# Allegro board pc054a_fmc_08.brd
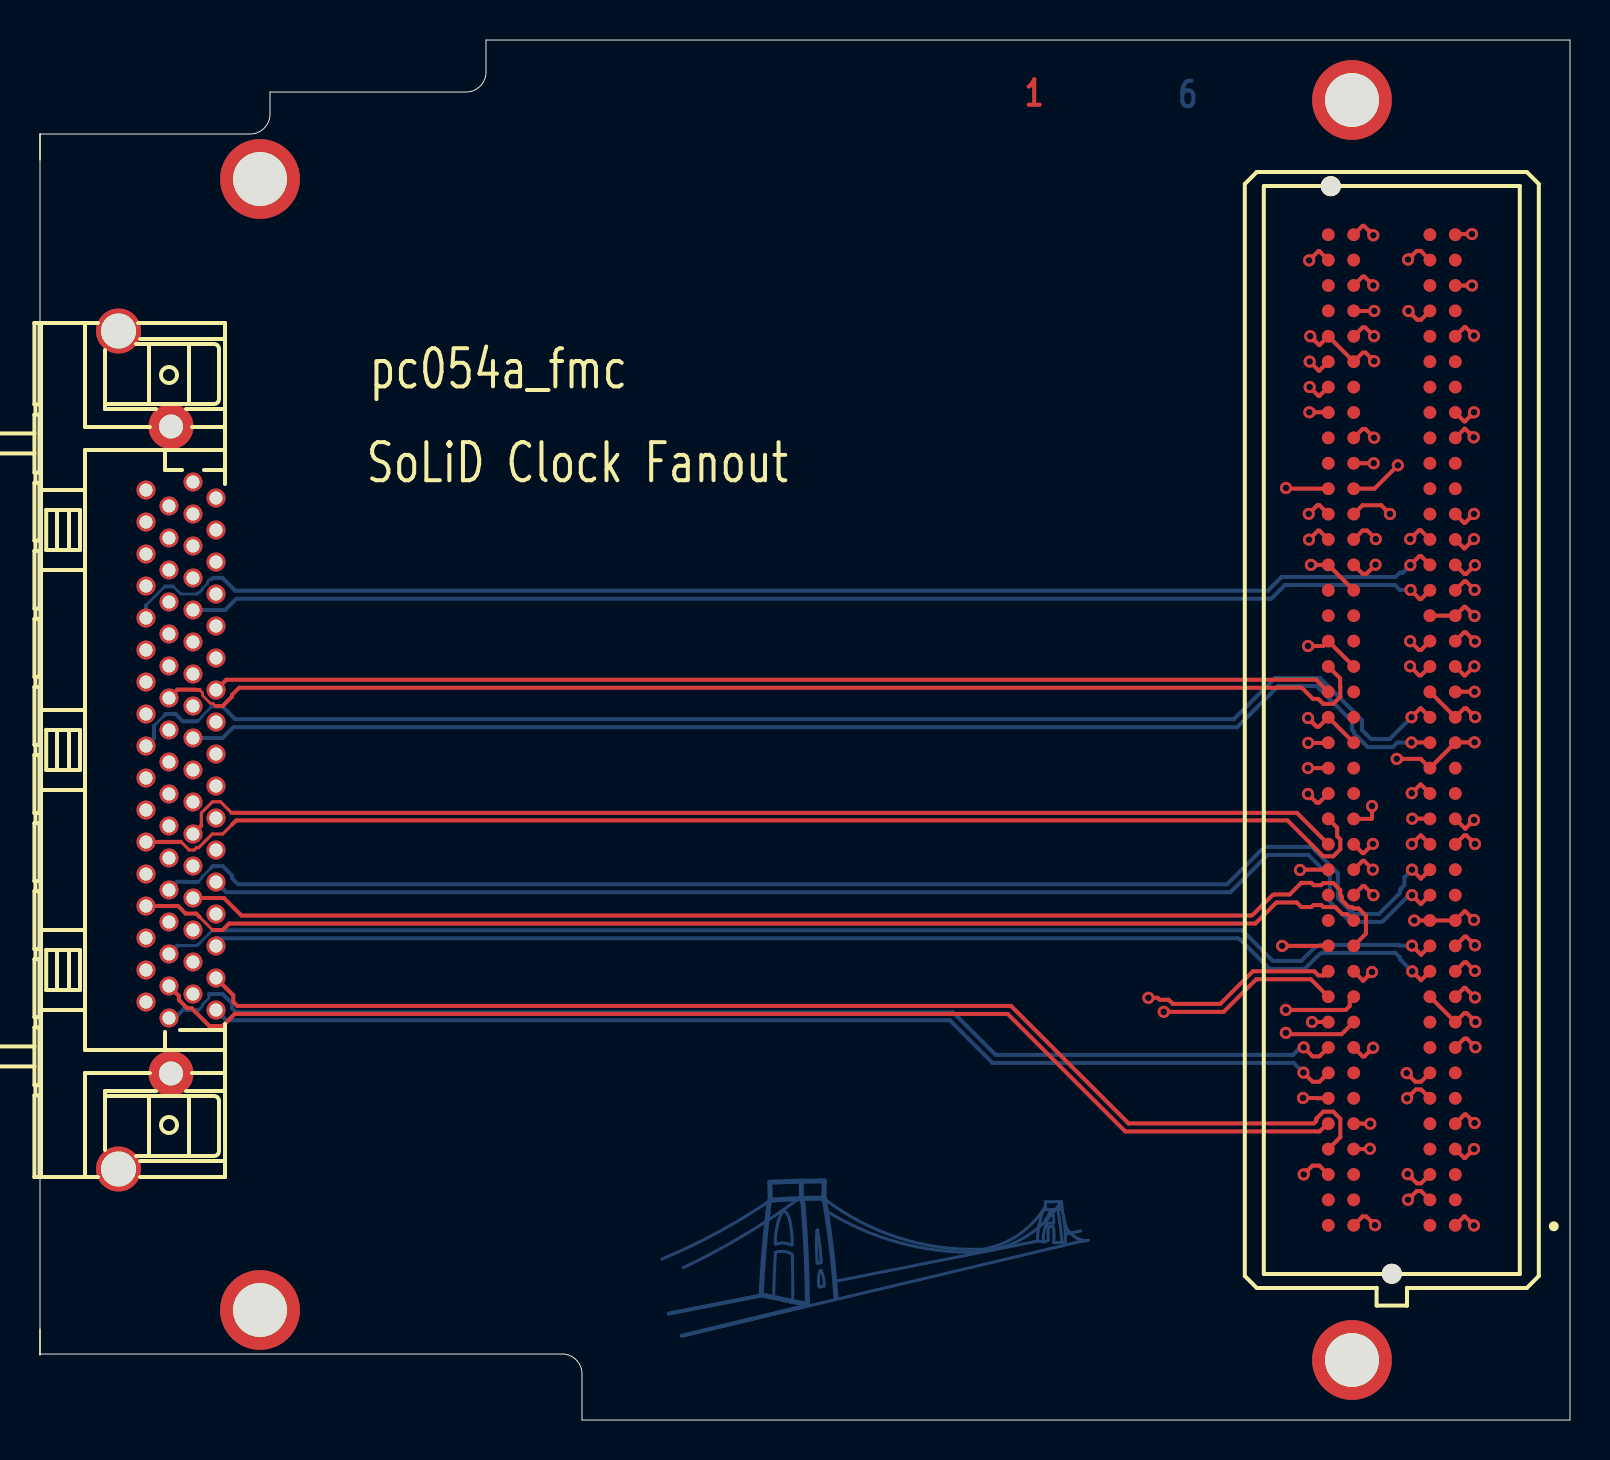
[diagram p0: board, top side]
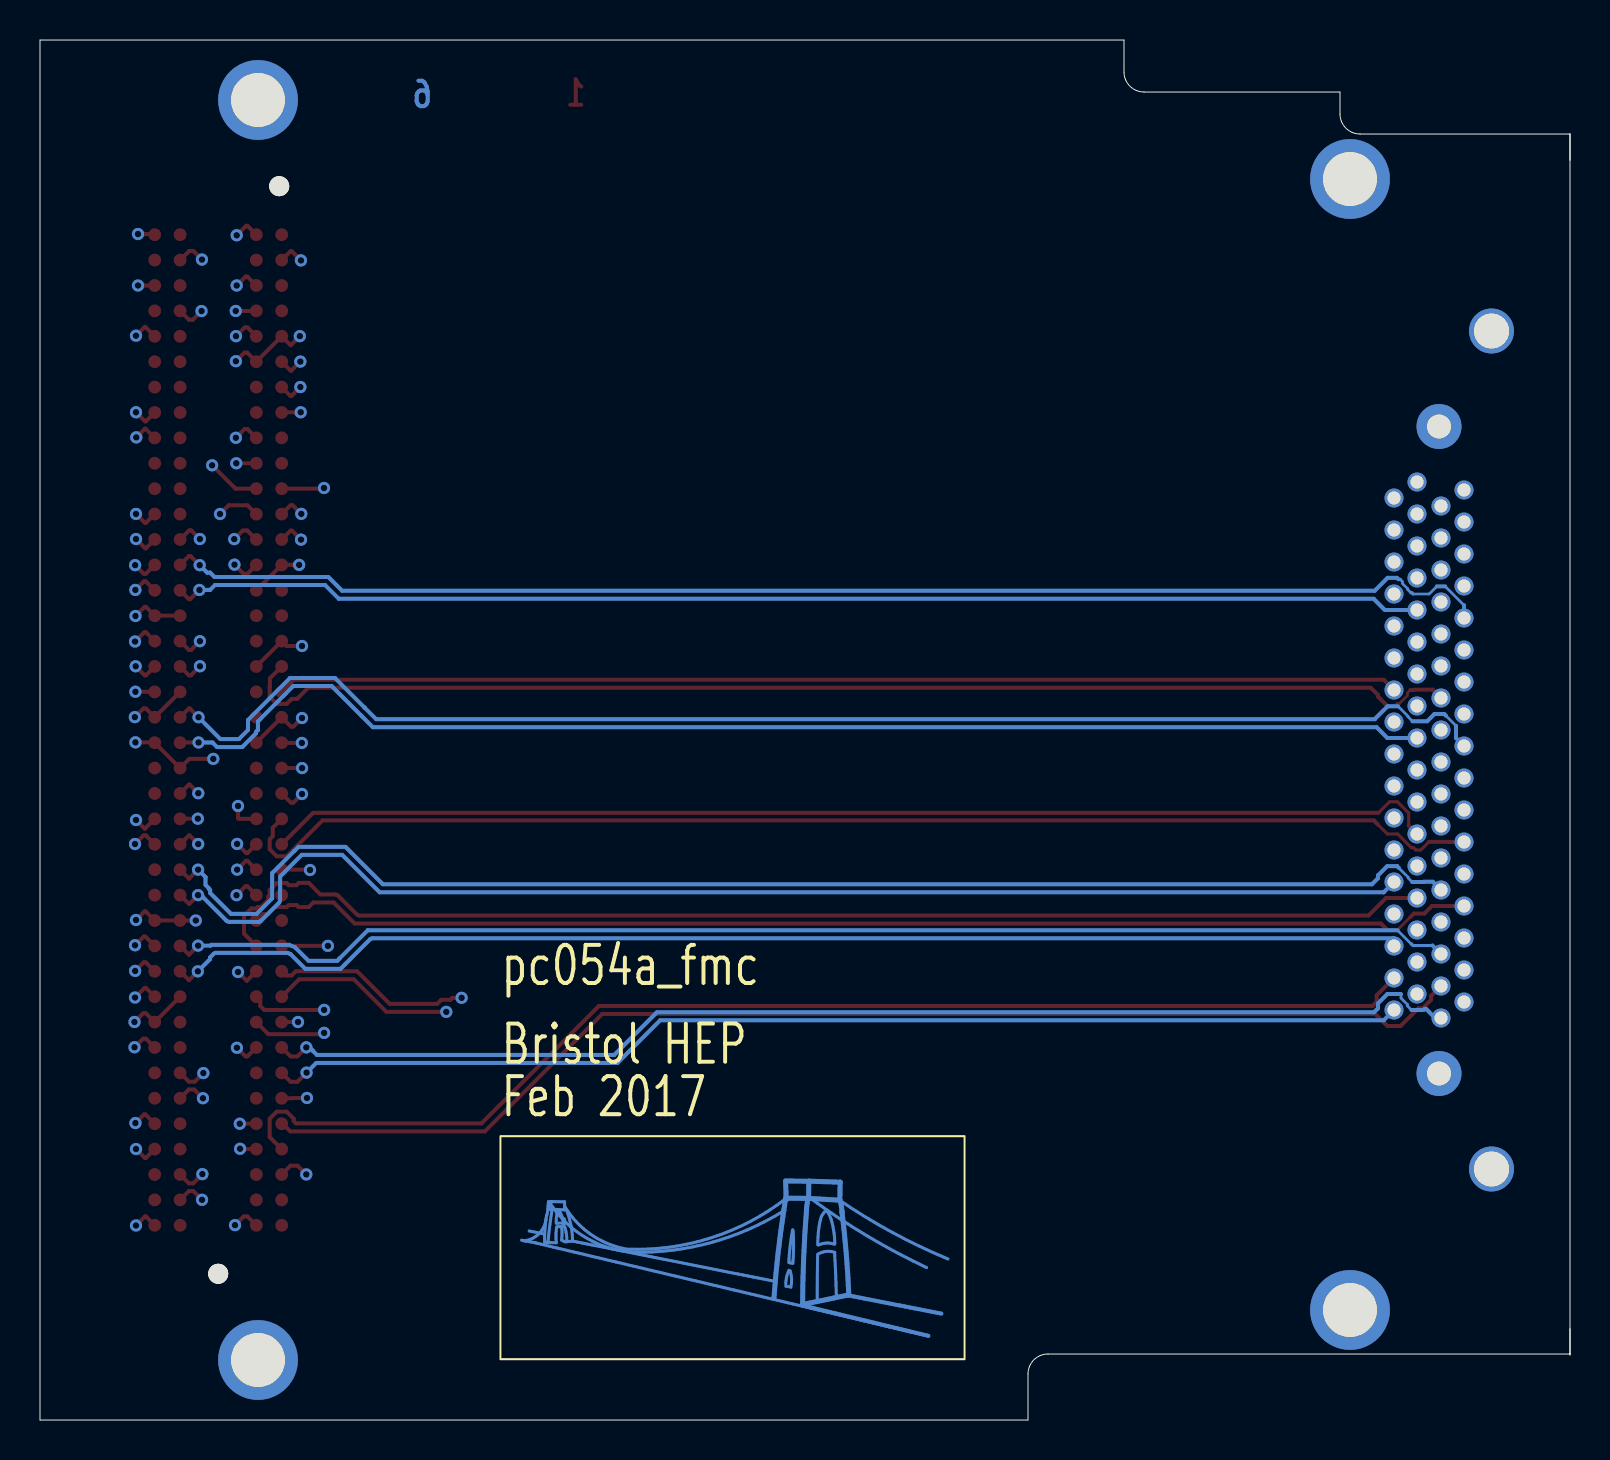
[diagram p1: board, bottom side, seen from below]

Outline 76.5 x 69 mm; copper layers: TOP, L2, L3, L4, L5, BOTTOM. Coordinates in mm from the lower left corner of the outline.
Outline path: 0,64.3 0,63 0,64.3 ; 0,64.3 10.5,64.3 arc(11.21,64.59) 11.5,65.3 11.5,66.4 21.3,66.4 arc(22.01,66.69) 22.3,67.4 22.3,69 76.5,69 76.5,0 27.1,0 27.1,2.3 arc(26.81,3.01) 26.1,3.3 0,3.3 0,64.3 ; 0,4.55 0,3.25 0,4.55

## Design rules (mm)
net group BUSY0: nets BUSY_N<0> BUSY_P<0>
net group BUSY1: nets BUSY_N<1> BUSY_P<1>
net group BUSY2: nets BUSY_N<2> BUSY_P<2>
net group BUSY3: nets BUSY_N<3> BUSY_P<3>
net group BUSY4: nets BUSY_N<4> BUSY_P<4>
net group BUSY5: nets BUSY_N<5> BUSY_P<5>
net group BUSY6: nets BUSY_N<6> BUSY_P<6>
net group BUSY7: nets BUSY_N<7> BUSY_P<7>
net group BUSY8: nets BUSY_N<8> BUSY_P<8>
net group BUSY9: nets BUSY_N<9> BUSY_P<9>
net group BUSY_FROM_FPGA: nets BUSY_FROM_FPGA_N BUSY_FROM_FPGA_P
net group CLK_FROM_FPGA: nets CLK_FROM_FPGA_N CLK_FROM_FPGA_P
net group CLK_RSTB: nets CLK_RSTB_N CLK_RSTB_P
net group CLK_TO_FPGA: nets CLK_TO_FPGA_N CLK_TO_FPGA_P
net group FMC_LA0: nets FMC_LA_N<0> FMC_LA_P<0>
net group FMC_LA1: nets FMC_LA_N<1> FMC_LA_P<1>
net group FMC_LA7: nets FMC_LA_N<7> FMC_LA_P<7>
net group FMC_LA10: nets FMC_LA_N<10> FMC_LA_P<10>
net group FMC_LA14: nets FMC_LA_N<14> FMC_LA_P<14>
net group FMC_LA16: nets FMC_LA_N<16> FMC_LA_P<16>
net group FMC_LA20: nets FMC_LA_N<20> FMC_LA_P<20>
net group FMC_LA21: nets FMC_LA_N<21> FMC_LA_P<21>
net group FMC_LA22: nets FMC_LA_N<22> FMC_LA_P<22>
net group FMC_LA28: nets FMC_LA_N<28> FMC_LA_P<28>
net group FMC_LA31: nets FMC_LA_N<31> FMC_LA_P<31>
net group FMC_LA32: nets FMC_LA_N<32> FMC_LA_P<32>
net group SCL_FROM_FPGA: nets SCL_FROM_FPGA_N SCL_FROM_FPGA_P
net group SDA_FROM_FPGA: nets SDA_FROM_FPGA_N SDA_FROM_FPGA_P
net group SDA_TO_FPGA: nets SDA_TO_FPGA_N SDA_TO_FPGA_P
net group SYNC_FROM_FPGA: nets SYNC_FROM_FPGA_N SYNC_FROM_FPGA_P
net group SYNC_SEL: nets SYNC_SEL_N SYNC_SEL_P
net group SYNC_TO_FPGA: nets SYNC_TO_FPGA_N SYNC_TO_FPGA_P
net group TRIG_FROM_FPGA: nets TRIG_FROM_FPGA_N TRIG_FROM_FPGA_P
net group TRIG_SEL: nets TRIG_SEL_N TRIG_SEL_P
net group TRIG_TO_FPGA: nets TRIG_TO_FPGA_N TRIG_TO_FPGA_P

## Placement (name value [footprint] x y rotation side)
J1  -  [MOLEX_71430-0008]  6.1 33.5 0 top
J2  -  [SAMTEC_ASP-134606-01]  67.59 34.5 270 top
LK1  -  [FXG_M2-7]  65.6 66 0 top
LK2  -  [FXG_M2-7]  65.6 3 0 top
LK3  -  [FXG_M2-7]  11 5.5 0 top
LK4  -  [FXG_M2-7]  11 62.05 0 top
NOREF  -  []  0 3.25 0 top
NOREF#2  -  []  41.9 7.9 0 top
NOREF#3  -  []  76.5 0 90 top
NOREF#4  -  []  -69.7 -77.6 0 top

## Library data of the parts
J1 = CON68P: part number: CON68P-71430-0008
J2 = CON160P_40CDGH: part number: ASP-134606-01
LK1-LK4 = 1-HOLE: part number: 1-HOLE_FXG2-7-BASE

## Footprints (pads in the part's own frame, mm; a bottom-side part is the same pattern mirrored in y, then rotated)
FXG_M2-7
  round 3.988 hole 2.692: 1(0,0)
MOLEX_71430-0008
  round 2.25 hole 1.75 unplated: (-2.175,20.95) (-2.175,-20.95)
  round 0.95 hole 0.65: 1(2.7,-13) 2(1.55,-12.2) 3(2.7,-11.4) 4(1.55,-10.6) 5(2.7,-9.8) 6(1.55,-9) 7(2.7,-8.2) 8(1.55,-7.4) 9(2.7,-6.6) 10(1.55,-5.8) 11(2.7,-5) 12(1.55,-4.2) 13(2.7,-3.4) 14(1.55,-2.6) 15(2.7,-1.8) 16(1.55,-1) 17(2.7,-0.2) 18(1.55,0.6) 19(2.7,1.4) 20(1.55,2.2) 21(2.7,3) 22(1.55,3.8) 23(2.7,4.6) 24(1.55,5.4) 25(2.7,6.2) 26(1.55,7) 27(2.7,7.8) 28(1.55,8.6) 29(2.7,9.4) 30(1.55,10.2) 31(2.7,11) 32(1.55,11.8) 33(2.7,12.6) 34(1.55,13.4) 35(0.35,-13.4) 36(-0.8,-12.6) 37(0.35,-11.8) 38(-0.8,-11) 39(0.35,-10.2) 40(-0.8,-9.4) 41(0.35,-8.6) 42(-0.8,-7.8) 43(0.35,-7) 44(-0.8,-6.2) 45(0.35,-5.4) 46(-0.8,-4.6) 47(0.35,-3.8) 48(-0.8,-3) 49(0.35,-2.2) 50(-0.8,-1.4) 51(0.35,-0.6) 52(-0.8,0.2) 53(0.35,1) 54(-0.8,1.8) 55(0.35,2.6) 56(-0.8,3.4) 57(0.35,4.2) 58(-0.8,5) 59(0.35,5.8) 60(-0.8,6.6) 61(0.35,7.4) 62(-0.8,8.2) 63(0.35,9) 64(-0.8,9.8) 65(0.35,10.6) 66(-0.8,11.4) 67(0.35,12.2) 68(-0.8,13)
  round 2.25 hole 1.2: 69(0.45,16.175) 70(0.45,-16.175)
SAMTEC_ASP-134606-01
  round 1 hole 1.3 unplated: (-27.19,-3.05) (27.19,0)
  round 0.64 smd: C1(24.765,3.175) C2(23.495,3.175) C3(22.225,3.175) C4(20.955,3.175) C5(19.685,3.175) C6(18.415,3.175) C7(17.145,3.175) C8(15.875,3.175) C9(14.605,3.175) C10(13.335,3.175) C11(12.065,3.175) C12(10.795,3.175) C13(9.525,3.175) C14(8.255,3.175) C15(6.985,3.175) C16(5.715,3.175) C17(4.445,3.175) C18(3.175,3.175) C19(1.905,3.175) C20(0.635,3.175) C21(-0.635,3.175) C22(-1.905,3.175) C23(-3.175,3.175) C24(-4.445,3.175) C25(-5.715,3.175) C26(-6.985,3.175) C27(-8.255,3.175) C28(-9.525,3.175) C29(-10.795,3.175) C30(-12.065,3.175) C31(-13.335,3.175) C32(-14.605,3.175) C33(-15.875,3.175) C34(-17.145,3.175) C35(-18.415,3.175) C36(-19.685,3.175) C37(-20.955,3.175) C38(-22.225,3.175) C39(-23.495,3.175) C40(-24.765,3.175) D1(24.765,1.905) D2(23.495,1.905) D3(22.225,1.905) D4(20.955,1.905) D5(19.685,1.905) D6(18.415,1.905) D7(17.145,1.905) D8(15.875,1.905) D9(14.605,1.905) D10(13.335,1.905) D11(12.065,1.905) D12(10.795,1.905) D13(9.525,1.905) D14(8.255,1.905) D15(6.985,1.905) D16(5.715,1.905) D17(4.445,1.905) D18(3.175,1.905) D19(1.905,1.905) D20(0.635,1.905) D21(-0.635,1.905) D22(-1.905,1.905) D23(-3.175,1.905) D24(-4.445,1.905) D25(-5.715,1.905) D26(-6.985,1.905) D27(-8.255,1.905) D28(-9.525,1.905) D29(-10.795,1.905) D30(-12.065,1.905) D31(-13.335,1.905) D32(-14.605,1.905) D33(-15.875,1.905) D34(-17.145,1.905) D35(-18.415,1.905) D36(-19.685,1.905) D37(-20.955,1.905) D38(-22.225,1.905) D39(-23.495,1.905) D40(-24.765,1.905) G1(24.765,-1.905) G2(23.495,-1.905) G3(22.225,-1.905) G4(20.955,-1.905) G5(19.685,-1.905) G6(18.415,-1.905) G7(17.145,-1.905) G8(15.875,-1.905) G9(14.605,-1.905) G10(13.335,-1.905) G11(12.065,-1.905) G12(10.795,-1.905) G13(9.525,-1.905) G14(8.255,-1.905) G15(6.985,-1.905) G16(5.715,-1.905) G17(4.445,-1.905) G18(3.175,-1.905) G19(1.905,-1.905) G20(0.635,-1.905) G21(-0.635,-1.905) G22(-1.905,-1.905) G23(-3.175,-1.905) G24(-4.445,-1.905) G25(-5.715,-1.905) G26(-6.985,-1.905) G27(-8.255,-1.905) G28(-9.525,-1.905) G29(-10.795,-1.905) G30(-12.065,-1.905) G31(-13.335,-1.905) G32(-14.605,-1.905) G33(-15.875,-1.905) G34(-17.145,-1.905) G35(-18.415,-1.905) G36(-19.685,-1.905) G37(-20.955,-1.905) G38(-22.225,-1.905) G39(-23.495,-1.905) G40(-24.765,-1.905) H1(24.765,-3.175) H2(23.495,-3.175) H3(22.225,-3.175) H4(20.955,-3.175) H5(19.685,-3.175) H6(18.415,-3.175) H7(17.145,-3.175) H8(15.875,-3.175) H9(14.605,-3.175) H10(13.335,-3.175) H11(12.065,-3.175) H12(10.795,-3.175) H13(9.525,-3.175) H14(8.255,-3.175) H15(6.985,-3.175) H16(5.715,-3.175) H17(4.445,-3.175) H18(3.175,-3.175) H19(1.905,-3.175) H20(0.635,-3.175) H21(-0.635,-3.175) H22(-1.905,-3.175) H23(-3.175,-3.175) H24(-4.445,-3.175) H25(-5.715,-3.175) H26(-6.985,-3.175) H27(-8.255,-3.175) H28(-9.525,-3.175) H29(-10.795,-3.175) H30(-12.065,-3.175) H31(-13.335,-3.175) H32(-14.605,-3.175) H33(-15.875,-3.175) H34(-17.145,-3.175) H35(-18.415,-3.175) H36(-19.685,-3.175) H37(-20.955,-3.175) H38(-22.225,-3.175) H39(-23.495,-3.175) H40(-24.765,-3.175)

## Nets
GND_SIGNAL: J1.4(A<3>) J1.7(A<6>) J1.10(A<9>) J1.13(A<12>) J1.17(A<16>) J1.19(A<18>) J1.22(A<21>) J1.25(A<24>) J1.28(A<27>) J1.31(A<30>) J1.34(A<33>) J1.38(A<37>) J1.41(A<40>) J1.44(A<43>) J1.47(A<46>) J1.51(A<50>) J1.53(A<52>) J1.56(A<55>) J1.59(A<58>) J1.62(A<61>) J1.65(A<64>) J1.68(A<67>) J1.69 J1.70 J2.C1(C<1>) J2.C4(C<4>) J2.C5(C<5>) J2.C8(C<8>) J2.C9(C<9>) J2.C12(C<12>) J2.C13(C<13>) J2.C16(C<16>) J2.C17(C<17>) J2.C20(C<20>) J2.C21(C<21>) J2.C24(C<24>) J2.C25(C<25>) J2.C28(C<28>) J2.C29(C<29>) J2.C32(C<32>) J2.C33(C<33>) J2.C36(C<36>) J2.C38(C<38>) J2.C40(C<40>) J2.D2(D<2>) J2.D3(D<3>) J2.D6(D<6>) J2.D7(D<7>) J2.D10(D<10>) J2.D13(D<13>) J2.D16(D<16>) J2.D19(D<19>) J2.D22(D<22>) J2.D25(D<25>) J2.D28(D<28>) J2.D37(D<37>) J2.D39(D<39>) J2.G1(G<1>) J2.G4(G<4>) J2.G5(G<5>) J2.G8(G<8>) J2.G11(G<11>) J2.G14(G<14>) J2.G17(G<17>) J2.G20(G<20>) J2.G23(G<23>) J2.G26(G<26>) J2.G29(G<29>) J2.G32(G<32>) J2.G35(G<35>) J2.G38(G<38>) J2.G40(G<40>) J2.H3(H<3>) J2.H6(H<6>) J2.H9(H<9>) J2.H12(H<12>) J2.H15(H<15>) J2.H18(H<18>) J2.H21(H<21>) J2.H24(H<24>) J2.H27(H<27>) J2.H30(H<30>) J2.H33(H<33>) J2.H36(H<36>) J2.H39(H<39>) LK1.1(A<0>) LK2.1(A<0>) LK3.1(A<0>) LK4.1(A<0>)
P2V5: J2.G39(G<39>) J2.H40(H<40>)
P3V3: J2.C39(C<39>) J2.D32(D<32>) J2.D36(D<36>) J2.D38(D<38>) J2.D40(D<40>)
P12V: J2.C35(C<35>) J2.C37(C<37>)
BUSY_FROM_FPGA_N: J1.52(A<51>) J2.D21(D<21>)
BUSY_FROM_FPGA_P: J1.18(A<17>) J2.D20(D<20>)
BUSY_N<0>: J1.54(A<53>) J2.C23(C<23>)
BUSY_N<1>: J1.55(A<54>) J2.H23(H<23>)
BUSY_N<2>: J1.57(A<56>) J2.D24(D<24>)
BUSY_N<3>: J1.58(A<57>) J2.H29(H<29>)
BUSY_N<4>: J1.60(A<59>) J2.D27(D<27>)
BUSY_N<5>: J1.61(A<60>) J2.C27(C<27>)
BUSY_N<6>: J1.63(A<62>) J2.G28(G<28>)
BUSY_N<7>: J1.64(A<63>) J2.G31(G<31>)
BUSY_N<8>: J1.66(A<65>) J2.H35(H<35>)
BUSY_N<9>: J1.67(A<66>) J2.G37(G<37>)
BUSY_P<0>: J1.20(A<19>) J2.C22(C<22>)
BUSY_P<1>: J1.21(A<20>) J2.H22(H<22>)
BUSY_P<2>: J1.23(A<22>) J2.D23(D<23>)
BUSY_P<3>: J1.24(A<23>) J2.H28(H<28>)
BUSY_P<4>: J1.26(A<25>) J2.D26(D<26>)
BUSY_P<5>: J1.27(A<26>) J2.C26(C<26>)
BUSY_P<6>: J1.29(A<28>) J2.G27(G<27>)
BUSY_P<7>: J1.30(A<29>) J2.G30(G<30>)
BUSY_P<8>: J1.32(A<31>) J2.H34(H<34>)
BUSY_P<9>: J1.33(A<32>) J2.G36(G<36>)
CLK_FROM_FPGA_N: J1.36(A<35>) J2.G10(G<10>)
CLK_FROM_FPGA_P: J1.2(A<1>) J2.G9(G<9>)
CLK_RSTB_N: J1.35(A<34>) J2.H8(H<8>)
CLK_RSTB_P: J1.1(A<0>) J2.H7(H<7>)
CLK_TO_FPGA_N: J1.37(A<36>) J2.H5(H<5>)
CLK_TO_FPGA_P: J1.3(A<2>) J2.H4(H<4>)
DP0_C2M: J2.C2(C<2>)
DP0_C2M*: J2.C3(C<3>)
DP0_M2C: J2.C6(C<6>)
DP0_M2C*: J2.C7(C<7>)
FMC_CLK1_M2C: J2.G2(G<2>)
FMC_CLK1_M2C*: J2.G3(G<3>)
FMC_LA_N<0>: J2.G7(G<7>)
FMC_LA_N<1>: J2.D9(D<9>)
FMC_LA_N<7>: J2.H14(H<14>)
FMC_LA_N<10>: J2.C15(C<15>)
FMC_LA_N<14>: J2.C19(C<19>)
FMC_LA_N<16>: J2.G19(G<19>)
FMC_LA_N<20>: J2.G22(G<22>)
FMC_LA_N<21>: J2.H26(H<26>)
FMC_LA_N<22>: J2.G25(G<25>)
FMC_LA_N<28>: J2.H32(H<32>)
FMC_LA_N<31>: J2.G34(G<34>)
FMC_LA_N<32>: J2.H38(H<38>)
FMC_LA_P<0>: J2.G6(G<6>)
FMC_LA_P<1>: J2.D8(D<8>)
FMC_LA_P<7>: J2.H13(H<13>)
FMC_LA_P<10>: J2.C14(C<14>)
FMC_LA_P<14>: J2.C18(C<18>)
FMC_LA_P<16>: J2.G18(G<18>)
FMC_LA_P<20>: J2.G21(G<21>)
FMC_LA_P<21>: J2.H25(H<25>)
FMC_LA_P<22>: J2.G24(G<24>)
FMC_LA_P<28>: J2.H31(H<31>)
FMC_LA_P<31>: J2.G33(G<33>)
FMC_LA_P<32>: J2.H37(H<37>)
FMC_PRSNT_M2C_L: J2.H2(H<2>)
FMC_PWR_GOOD_FLASH_RST_B: J2.D1(D<1>)
FMC_TCK_BUF: J2.D29(D<29>)
FMC_TDO: J2.D31(D<31>)
FMC_TMS_BUF: J2.D33(D<33>)
FPGA_TDO: J2.D30(D<30>)
GA0: J2.C34(C<34>)
GA1: J2.D35(D<35>)
GBTCLK0_M2C: J2.D4(D<4>)
GBTCLK0_M2C*: J2.D5(D<5>)
IIC_SCL_MAIN: J2.C30(C<30>)
IIC_SDA_MAIN: J2.C31(C<31>)
SCL_FROM_FPGA_N: J1.48(A<47>) J2.D18(D<18>)
SCL_FROM_FPGA_P: J1.14(A<13>) J2.D17(D<17>)
SDA_FROM_FPGA_N: J1.49(A<48>) J2.H11(H<11>)
SDA_FROM_FPGA_P: J1.15(A<14>) J2.H10(H<10>)
SDA_TO_FPGA_N: J1.50(A<49>) J2.H20(H<20>)
SDA_TO_FPGA_P: J1.16(A<15>) J2.H19(H<19>)
SYNC_FROM_FPGA_N: J1.42(A<41>) J2.G13(G<13>)
SYNC_FROM_FPGA_P: J1.8(A<7>) J2.G12(G<12>)
SYNC_SEL_N: J1.46(A<45>) J2.H17(H<17>)
SYNC_SEL_P: J1.12(A<11>) J2.H16(H<16>)
SYNC_TO_FPGA_N: J1.43(A<42>) J2.D15(D<15>)
SYNC_TO_FPGA_P: J1.9(A<8>) J2.D14(D<14>)
TRIG_FROM_FPGA_N: J1.39(A<38>) J2.D12(D<12>)
TRIG_FROM_FPGA_P: J1.5(A<4>) J2.D11(D<11>)
TRIG_SEL_N: J1.45(A<44>) J2.G16(G<16>)
TRIG_SEL_P: J1.11(A<10>) J2.G15(G<15>)
TRIG_TO_FPGA_N: J1.40(A<39>) J2.C11(C<11>)
TRIG_TO_FPGA_P: J1.6(A<5>) J2.C10(C<10>)
TRST_L: J2.D34(D<34>)
VREF_A_M2C: J2.H1(H<1>)

## Via types
v1: diameter 0.61, hole 0.33, TOP to BOTTOM, 93 vias

## Routing (per net, layer and track width the routed paths; a pad name or vN(x,y) marks a point on that pad's centre or on a via; arc(x,y) is an arc through that point)
GND_SIGNAL: length 413.2
  TOP w0.2: J2.C24 71.21,39.39 71.28,39.39 v1(71.75,38.92) ; J2.D6 69.05,16.53 68.79,16.53 v1(68.35,16.09) ; J2.G20 J2.H21 63.95,34.67 63.83,34.67 v1(63.4,35.1) ; J2.H12 v1(62.11,23.71) ; 65.68,9.74 66.13,10.18 66.31,10.18 v1(66.75,9.74) ; J2.C16 71.21,29.23 71.32,29.23 v1(71.75,28.8) ; 69.49,55.46 69.05,55.01 68.86,55.01 v1(68.42,55.45) ; v1(63.45,57.98) 63.91,58.44 63.97,58.44 64.41,58 ; J2.C38 70.77,56.73 v1(71.6,56.73) ; 69.49,44.03 69.04,44.48 68.94,44.48 v1(68.51,44.05) ; v1(68.4,11.01) 68.84,11.45 69.05,11.45 J2.D2 ; v1(68.4,58.02) 68.83,58.45 69.04,58.45 69.49,58 ; v1(67.84,33.06) 69.04,33.06 J2.D19 J2.C20 70.78,33.88 v1(71.73,33.88) ; v1(67.5,45.3) 67.06,45.74 66.13,45.74 J2.G29 ; J2.D16 69.05,29.23 69.02,29.23 v1(68.59,28.8) ; v1(71.7,45.3) 71.25,44.85 71.21,44.85 J2.C29 ; v1(71.7,9.72) 71.25,10.18 71.21,10.18 70.77,9.74 ; v1(66.71,52.94) 66.28,53.37 66.14,53.37 J2.G35 64.41,54.19 63.97,53.74 63.96,53.74 v1(63.51,54.19) ; 70.77,23.71 71.23,24.17 71.32,24.17 v1(71.75,23.74) ; J2.G26 64.41,42.76 v1(63.54,42.76) ; v1(63.4,38.7) 64.17,38.7 J2.H24 J2.G23 ; 65.68,26.25 66.13,26.69 66.23,26.69 v1(66.67,26.24) ; v1(71.7,25) 71.27,25.43 71.22,25.43 70.77,24.98 J2.D13 v1(68.71,24.98) ; J2.D3 69.05,11.83 68.84,11.83 v1(68.38,12.29) ; 64.41,46.57 62.33,46.57 v1(62.3,46.6) ; v1(71.7,54.21) 71.27,54.65 71.22,54.65 J2.C36 ; 65.68,14.82 66.51,14.82 v1(66.51,14.81) ; v1(71.69,49.13) 71.26,49.56 71.22,49.56 J2.C32 ; v1(71.78,18.64) 71.34,19.07 71.21,19.07 70.77,18.63 ; 70.77,14.82 71.23,15.28 71.3,15.28 v1(71.73,14.85) ; v1(71.76,35.14) 71.32,35.58 71.21,35.58 J2.C21 69.49,36.41 ; 70.77,13.55 71.21,13.1 71.25,13.1 v1(71.7,13.55) ; v1(66.71,49.11) 66.27,49.55 66.13,49.55 J2.G32 ; 65.68,13.55 66.48,13.55 v1(66.5,13.56) ; v1(71.73,40.2) 71.27,40.66 71.21,40.66 J2.C25 69.49,40.22 ; v1(66.66,18.61) 66.22,18.18 66.13,18.18 65.68,18.63 ; v1(63,27.5) 63.02,27.52 J2.H15 ; J2.C17 71.25,29.57 71.27,29.57 v1(71.7,30) ; J2.G40 66.13,59.71 66.19,59.71 v1(66.67,59.24) ; v1(68.33,17.35) 68.76,16.91 69.05,16.91 J2.D7 ; v1(63.47,50.39) 64.4,50.39 64.41,50.38 ; J2.H9 64.41,19.9 v1(63.6,19.9) ; J2.C33 71.21,49.93 71.25,49.93 v1(71.7,50.39) ; v1(63.18,12.28) 63.62,12.72 63.97,12.72 J2.H3 ; v1(66.6,22.4) 66.17,21.97 66.15,21.97 65.68,22.44 ; v1(71.6,59.3) 70.8,59.3 J2.C40 ; J2.D10 70.77,19.9 71.21,20.34 71.34,20.34 v1(71.78,19.9) ; J2.H6 63.87,16.09 63.85,16.1 v1(63.15,16.1) ; 65.68,30.06 66.57,30.06 66.6,30.09 v1(66.6,30.7) ; J2.G38 66.13,57.17 66.22,57.17 v1(66.67,56.73) ; v1(63.4,31.3) 63.83,30.87 63.96,30.87 J2.H18 ; v1(71.7,44.05) 71.24,43.58 71.21,43.58 J2.C28
  L2 w0.2: 5.3,36.15 J1.56 ; J1.56 5.3,37.65 ; J1.56 4.72,37.48 ; J1.56 4.55,36.9 ; J1.56 4.72,36.32 ; J1.19 9.38,35.48 ; J1.19 8.8,34.15 ; J1.19 9.38,34.32 ; J1.19 9.55,34.9 ; J1.19 8.8,35.65 ; LK2.1 67.42,4.82 ; LK2.1 67.42,1.18 ; LK2.1 63.1,3 ; LK2.1 68.1,3 ; LK2.1 65.6,0.5 ; LK2.1 63.78,4.82 ; LK2.1 65.6,5.5 ; LK2.1 63.78,1.18 ; J1.17 9.38,33.88 ; J1.17 9.55,33.3 ; J1.17 9.38,32.72 ; J1.17 8.8,34.05 ; J1.17 8.8,32.55 ; 5.15,49.67 J1.69 ; J1.69 7.59,48.63 ; J1.69 5.51,50.72 ; J1.69 6.55,48.27 ; J1.69 6.55,51.08 ; J1.69 7.95,49.67 ; J1.69 7.59,50.72 ; J1.69 5.51,48.63 ; 4.72,45.92 J1.68 ; J1.68 4.72,47.08 ; J1.68 5.3,47.25 ; J1.68 4.55,46.5 ; J1.68 5.3,45.75 ; J1.68 6.05,46.5 ; J1.68 5.88,47.08 ; LK4.1 12.82,60.23 ; LK4.1 8.5,62.05 ; LK4.1 13.5,62.05 ; LK4.1 9.18,63.87 ; LK4.1 9.18,60.23 ; LK4.1 11,59.55 ; LK4.1 12.82,63.87 ; J1.34 8.23,47.48 ; J1.34 8.4,46.9 ; J1.34 7.07,47.48 ; J1.34 6.9,46.9 ; J1.34 7.07,46.32 ; J1.34 7.65,46.15 ; J1.34 7.65,47.65 ; 5.33,39.36 5.39,39.3 J1.59 ; J1.70 7.59,16.28 ; J1.70 6.55,18.73 ; J1.70 5.15,17.32 ; J1.70 6.55,15.92 ; J1.70 7.59,18.37 ; J1.70 5.51,18.37 ; J1.70 5.51,16.28 ; J1.70 7.95,17.32 ; 9.22,22.88 9.2,22.9 J1.4 ; 63.78,64.18 LK1.1 ; LK1.1 67.42,64.18 ; LK1.1 63.1,66 ; LK1.1 65.6,63.5 ; LK1.1 67.42,67.82 ; LK1.1 68.1,66 ; LK1.1 63.78,67.82 ; J1.65 5.28,44.1 5.27,44.1 ; 8.8,43.75 J1.31 ; J1.31 9.38,43.92 ; J1.31 9.55,44.5 ; J1.31 8.8,45.25 ; J1.31 9.38,45.08 ; J1.62 5.3,42.45 ; J1.62 4.72,42.28 ; J1.62 6.05,41.7 ; J1.62 4.55,41.7 ; J1.62 5.3,40.95 ; J1.62 4.72,41.12 ; J1.7 9.38,25.88 ; J1.7 8.8,24.55 ; J1.7 9.38,24.72 ; J1.7 9.55,25.3 ; J1.7 8.8,26.05 ; LK3.1 13.5,5.5 ; LK3.1 8.5,5.5 ; LK3.1 9.18,3.68 ; LK3.1 12.82,7.32 ; LK3.1 11,8 ; LK3.1 12.82,3.68 ; LK3.1 9.18,7.32 ; 7.07,41.52 J1.28 ; J1.28 7.65,41.35 ; J1.28 8.4,42.1 ; J1.28 7.65,42.85 ; J1.51 5.75,32.9 5.64,33.01 5.52,32.89 5.18,32.89 ; J1.53 4.99,34.5 4.93,34.44 ; J1.25 8.8,40.45 ; J1.25 9.55,39.7 ; J1.25 8.8,38.95 ; J1.25 9.38,40.28 ; J1.25 9.38,39.12 ; 8.8,29.35 J1.13 ; J1.13 9.55,30.1 ; J1.13 9.38,30.68 ; J1.13 9.38,29.52 ; J1.13 8.8,30.85 ; 5.19,29.72 5.21,29.7 J1.47 ; 8.92,37.3 8.57,37.3 8.46,37.41 8.35,37.3 J1.22 ; 4.72,23.08 J1.38 ; J1.38 4.55,22.5 ; J1.38 5.3,23.25 ; J1.38 4.72,21.92 ; J1.38 5.3,21.75 ; J1.38 6.05,22.5 ; 4.72,26.72 J1.44 ; J1.44 4.72,27.88 ; J1.44 5.3,26.55 ; J1.44 5.3,28.05 ; J1.44 4.55,27.3 ; 8.73,27.78 8.65,27.7 J1.10 ; J1.41 5.45,24.9 5.38,24.97
  L5 w0.2: LK1.1 67.47,67.87 ; LK1.1 65.6,63.47 ; LK1.1 68.13,66 ; LK1.1 63.07,66 ; LK1.1 67.47,64.13 ; LK1.1 63.73,67.87 ; LK1.1 63.73,64.13 ; J1.34 7.65,47.68 ; J1.34 8.43,46.9 ; J1.34 7.02,47.53 ; J1.34 8.28,47.53 ; J1.34 7.65,46.12 ; J1.34 6.87,46.9 ; J1.34 7.02,46.27 ; J1.13 9.43,30.73 ; J1.13 8.8,30.88 ; J1.13 9.43,29.47 ; J1.13 9.58,30.1 ; J1.13 8.8,29.32 ; J1.38 5.3,23.28 ; J1.38 4.67,23.13 ; J1.38 4.52,22.5 ; J1.38 4.67,21.87 ; J1.38 6.08,22.5 ; J1.38 5.3,21.72 ; J1.7 8.8,26.08 ; J1.7 8.8,24.52 ; J1.7 9.58,25.3 ; J1.7 9.43,25.93 ; J1.7 9.43,24.67 ; LK2.1 68.13,3 ; LK2.1 63.73,4.87 ; LK2.1 65.6,5.53 ; LK2.1 67.47,1.13 ; LK2.1 63.73,1.13 ; LK2.1 67.47,4.87 ; LK2.1 63.07,3 ; 5.46,16.24 J1.70 ; J1.70 7.64,18.41 ; J1.70 5.12,17.32 ; J1.70 5.46,18.41 ; J1.70 7.98,17.32 ; J1.70 7.64,16.24 ; J1.70 6.55,15.89 ; J1.70 6.55,18.76 ; 5.3,36.12 J1.56 ; J1.56 4.52,36.9 ; J1.56 4.67,37.53 ; J1.56 5.3,37.68 ; J1.56 4.67,36.27 ; J1.62 6.08,41.7 ; J1.62 5.3,42.48 ; J1.62 4.67,41.07 ; J1.62 5.3,40.92 ; J1.62 4.67,42.33 ; J1.62 4.52,41.7 ; J1.59 5.3,39.3 5.25,39.35 ; J1.19 8.8,35.68 ; J1.19 8.8,34.12 ; J1.19 9.43,35.53 ; J1.19 9.43,34.27 ; J1.19 9.58,34.9 ; LK3.1 12.87,3.63 ; LK3.1 9.13,7.37 ; LK3.1 12.87,7.37 ; LK3.1 11,8.03 ; LK3.1 13.53,5.5 ; LK3.1 8.47,5.5 ; LK3.1 9.13,3.63 ; J1.28 7.65,42.88 ; J1.28 7.65,41.32 ; J1.28 7.02,41.47 ; J1.28 8.43,42.1 ; J1.17 9.43,32.67 ; J1.17 9.58,33.3 ; J1.17 8.8,32.52 ; J1.17 8.8,34.08 ; J1.17 9.43,33.93 ; 4.67,47.13 J1.68 ; J1.68 5.93,47.13 ; J1.68 4.67,45.87 ; J1.68 4.52,46.5 ; J1.68 6.08,46.5 ; J1.68 5.3,47.28 ; J1.68 5.3,45.72 ; LK4.1 12.87,63.92 ; LK4.1 12.87,60.18 ; LK4.1 9.13,60.18 ; LK4.1 13.53,62.05 ; LK4.1 11,59.52 ; LK4.1 8.47,62.05 ; J1.25 9.43,39.07 ; J1.25 9.58,39.7 ; J1.25 8.8,40.48 ; J1.25 8.8,38.92 ; J1.25 9.43,40.33 ; 5.44,44.21 5.55,44.1 J1.65 ; J1.41 5.34,24.9 5.27,24.97 ; 5.46,48.59 J1.69 ; J1.69 7.64,48.59 ; J1.69 5.46,50.76 ; J1.69 7.98,49.67 ; J1.69 7.64,50.76 ; J1.69 6.55,51.11 ; J1.69 5.12,49.67 ; J1.69 6.55,48.24 ; 8.94,37.32 8.93,37.3 J1.22 ; 5.29,32.88 5.31,32.9 J1.51 ; 8.68,27.61 8.59,27.7 J1.10 ; 5.4,34.45 5.45,34.5 J1.53 ; J1.31 9.43,45.13 ; J1.31 9.58,44.5 ; J1.31 8.8,45.28 ; J1.31 8.8,43.72 ; J1.31 9.43,43.87 ; J1.47 5.4,29.7 5.37,29.66 ; 8.77,22.81 8.68,22.9 J1.4 ; 5.3,26.52 J1.44 ; J1.44 5.3,28.08 ; J1.44 4.52,27.3 ; J1.44 4.67,26.67 ; J1.44 4.67,27.93
BUSY_FROM_FPGA_N: length 69.2
  TOP w0.2: J2.D21 69.05,35.58 69.01,35.58 v1(68.57,35.14)
  BOTTOM w0.131: 8.59,35.68 8.1,35.19 8.1,35.16 7.88,34.94 ; 5.7,34.71 6.2,35.21
  BOTTOM w0.2: 8.59,35.68 9.12,35.68 9.76,35.04 59.69,35.04 60.27,35.62 60.27,35.62 61.75,37.1 64,37.1 66.1,35 66.1,34.5 66.55,34.05 67.48,34.05 v1(68.57,35.14) ; 6.2,35.21 6.29,35.3 6.78,35.3 7.14,34.94 7.88,34.94 ; 5.7,34.71 5.7,34.1 J1.52
BUSY_FROM_FPGA_P: length 64.6
  TOP w0.2: J2.D20 69.48,33.88 v1(68.57,33.88)
  BOTTOM w0.2: J1.18 9.13,34.1 9.67,34.64 59.85,34.64 60.43,35.22 60.43,35.22 61.92,36.7 63.83,36.7 65.6,34.93 65.6,34.5 65.7,34.4 65.7,34.33 66.39,33.65 67.65,33.65 67.88,33.88 v1(68.57,33.88)
BUSY_N<0>: length 70.4
  TOP w0.2: J2.C23 71.21,37.23 71.26,37.23 v1(71.72,37.69)
  L3 w0.131: 8.61,37.3 8.1,36.79 8.1,36.78 7.86,36.54
  L3 w0.155: 5.68,36.29 6.27,36.89
  L3 w0.2: 6.27,36.89 6.77,36.89 7.12,36.54 7.86,36.54 ; J1.54 5.68,35.68 5.68,36.29 ; v1(71.72,37.69) 71.27,37.24 69.34,37.24 69.09,37 67.99,37 67.34,37.65 67.29,37.65 67.25,37.69 63.67,37.69 62.76,36.79 9.61,36.79 9.09,37.3 8.61,37.3
BUSY_N<1>: length 61.8
  TOP w0.131: 7.98,36.5 8.13,36.35 8.13,36.22 8.52,35.83 8.65,35.83 8.78,35.7
  TOP w0.155: 7.79,36.52 7.81,36.5
  TOP w0.2: J2.H23 65,37.09 65,36.67 65.02,36.65 65.02,36.16 64.66,35.81 64.17,35.81 63.99,35.98 63.99,35.98 63.91,36.06 63.65,36.06 63.09,36.61 9.96,36.61 9.6,36.25 9.6,36.17 9.13,35.7 8.78,35.7 ; 7.81,36.5 7.98,36.5 ; J1.55 6.87,36.52 7.79,36.52
BUSY_N<2>: length 65.4
  TOP w0.2: 69.49,38.95 69.05,38.5 68.94,38.5 v1(68.51,38.94)
  L4 w0.155: 7.78,38.15 7.85,38.08 7.86,38.08 8.63,37.3 9.13,37.3 10.08,38.25
  L4 w0.2: v1(68.51,38.94) 66.95,37.39 66.94,37.39 66.9,37.34 62.01,37.34 61.1,38.25 10.08,38.25 ; J1.57 6.9,38.15 7.78,38.15
BUSY_N<3>: length 65.6
  TOP w0.2: v1(63.44,45.31) 63.87,45.74 63.97,45.74 64.41,45.3
  L3 w0.131: 5.71,39.52 6.3,40.12 ; 8.57,40.46 8.1,39.99 8.1,39.98 7.86,39.74 7.22,39.74
  L3 w0.155: 6.85,40.12 7.22,39.74
  L3 w0.2: 5.71,39.52 5.71,38.91 J1.58 ; 6.3,40.12 6.85,40.12 ; 8.57,40.46 9.03,40.46 10.13,39.37 59.95,39.37 61.39,40.81 61.39,43.77 62.49,44.87 63,44.87 v1(63.44,45.31)
BUSY_N<4>: length 67
  TOP w0.2: v1(68.52,42.74) 68.97,43.2 69.05,43.2 69.49,42.76
  BOTTOM w0.131: 8.49,42.04 8.38,41.92 8.38,41.83 8.13,41.58 8.13,41.54 7.96,41.36 ; 7.85,41.3 7.04,41.3 6.66,41.68 ; 5.3,40.74 6.24,41.68
  BOTTOM w0.155: 8.49,42.04 8.58,42.04 ; 7.85,41.3 7.91,41.36 7.96,41.36
  BOTTOM w0.2: v1(68.52,42.74) 68.14,42.37 67.99,42.37 67.78,42.15 62.08,42.15 61.39,41.46 9.77,41.46 9.12,42.11 8.65,42.11 8.58,42.04 ; J1.60 5.3,40.74 ; 6.24,41.68 6.66,41.68
BUSY_N<5>: length 69.7
  TOP w0.2: v1(71.74,42.74) 71.31,42.31 71.21,42.31 J2.C27
  L4 w0.155: 7.8,41.32 7.85,41.28 7.86,41.28 8.63,40.5 9.13,40.5 9.6,40.97 9.6,41.03
  L4 w0.2: J1.61 6.87,41.32 7.8,41.32 ; 9.6,41.03 9.64,41.07 67.09,41.07 67.11,41.05 67.12,41.05 68.08,40.09 70.35,40.09 71.18,40.92 71.18,41.2 71.13,41.25 71.13,41.75 71.39,42.02 71.39,42.39 v1(71.74,42.74)
BUSY_N<6>: length 65.1
  TOP w0.2: J2.G28 66.13,44.47 66.36,44.47 v1(66.79,44.04)
  L3 w0.155: 7.78,42.86 8.52,43.6
  L3 w0.2: v1(66.79,44.04) 66.79,44.57 66.69,44.67 66.69,45.44 65.93,46.2 63.96,46.2 63.85,46.31 63.02,46.31 62.41,45.7 62.4,45.7 59.61,45.7 arc(59.53,45.68) 59.47,45.64 57.71,43.89 arc(57.65,43.84) 57.57,43.83 9.25,43.83 arc(9.17,43.81) 9.1,43.77 8.94,43.6 8.52,43.6 ; 7.78,42.86 7.28,42.86 6.92,42.5 J1.63
BUSY_N<7>: length 65.3
  TOP w0.2: J2.G31 v1(66.69,47.84)
  L4 w0.155: 8.47,42.13 8.33,42.27 8.33,42.38 7.93,42.78 7.82,42.78 7.69,42.92
  L4 w0.2: J1.64 6.8,43.3 7.18,42.92 7.69,42.92 ; v1(66.69,47.84) 65.12,47.84 63.19,45.91 63.19,45.91 62.83,45.56 62.83,45.55 59.65,42.36 9.35,42.36 9.12,42.13 8.47,42.13
BUSY_N<8>: length 65.1
  TOP w0.2: 64.41,52.92 63.97,52.47 63.93,52.47 v1(63.48,52.92)
  L4 w0.155: 8.58,45.25 7.83,44.49 7.83,44.48
  L4 w0.2: J1.66 6.77,44.9 7.18,44.48 7.83,44.48 ; 8.58,45.25 9.79,45.25 9.84,45.2 50.85,45.2 arc(50.93,45.22) 50.99,45.26 56.89,51.15 arc(56.95,51.2) 57.03,51.21 63.07,51.21 63.23,51.04 63.73,51.04 64.09,51.4 64.09,52.32 v1(63.48,52.92)
BUSY_N<9>: length 67.4
  TOP w0.2: J2.G37 65.69,55.45 v1(66.71,55.45)
  L3 w0.2: J1.67 6.45,46.72 7.43,47.7 7.98,47.7 8.78,46.9 9.13,46.9 9.6,46.43 9.6,46.29 9.9,45.99 53.61,45.99 63.08,55.45 v1(66.71,55.45)
BUSY_P<0>: length 66.7
  TOP w0.2: v1(71.73,36.41) 70.77,36.41 J2.C22
  L3 w0.2: J1.20 9.53,35.7 9.53,36.39 62.85,36.39 arc(62.92,36.4) 62.99,36.44 63.83,37.29 67.09,37.29 67.12,37.25 67.17,37.25 67.83,36.6 69.26,36.6 69.32,36.66 69.34,36.66 69.52,36.84 71.3,36.84 v1(71.73,36.41)
BUSY_P<1>: length 56.1
  TOP w0.2: J2.H22 63.81,37.01 9.31,37.01 J1.21
BUSY_P<2>: length 65.1
  TOP w0.2: v1(68.5,37.69) 68.95,37.23 69.05,37.23 69.49,37.68
  L4 w0.2: J1.23 9.3,38.6 9.92,38.6 9.93,38.61 61.25,38.61 62.12,37.74 66.73,37.74 67.9,38.91 67.9,39.19 68.25,39.54 68.76,39.54 69.11,39.19 69.11,38.69 69.11,38.29 v1(68.5,37.69)
BUSY_P<3>: length 61.3
  TOP w0.2: 64.41,44.03 63.97,44.47 63.9,44.47 v1(63.45,44.02)
  L3 w0.2: J1.24 9.07,38.9 9.11,38.86 9.59,39.34 9.9,39.03 arc(9.97,38.98) 10.04,38.97 60.03,38.97 arc(60.1,38.98) 60.17,39.03 61.73,40.59 arc(61.77,40.65) 61.79,40.73 61.79,43.52 arc(61.8,43.6) 61.84,43.66 62.2,44.02 v1(63.45,44.02)
BUSY_P<4>: length 62.8
  TOP w0.2: v1(68.53,41.5) 68.99,41.04 69.05,41.04 69.49,41.49
  BOTTOM w0.2: v1(68.53,41.5) 68,41.5 67.75,41.75 62.25,41.75 61.56,41.06 9.82,41.06 9.25,40.5 J1.26
BUSY_P<5>: length 69.3
  TOP w0.2: J2.C26 71.21,41.93 71.3,41.93 v1(71.73,41.5)
  L4 w0.2: J1.27 8.97,41.47 67.25,41.47 67.28,41.45 67.28,41.45 68.24,40.49 70.06,40.49 70.77,41.19 70.77,41.9 70.99,42.12 70.99,42.84 71.49,43.35 71.99,43.35 72.35,42.99 72.35,42.25 72.11,42 72.11,41.88 v1(71.73,41.5)
BUSY_P<6>: length 63.3
  TOP w0.2: v1(66.78,42.77) 66.32,42.31 66.13,42.31 J2.G27
  L3 w0.2: v1(66.78,42.77) 66.35,43.19 66.35,43.63 66.18,43.79 66.18,44.29 66.34,44.45 66.34,44.46 66.29,44.51 66.29,45.28 65.77,45.8 63.8,45.8 63.69,45.91 63.19,45.91 62.83,45.56 62.83,45.49 62.65,45.3 59.69,45.3 57.82,43.43 9.33,43.43 J1.29
BUSY_P<7>: length 66
  TOP w0.2: v1(67.89,47.74) 66.72,46.57 J2.G30
  L4 w0.2: J1.30 9.38,43.7 10.32,42.76 59.48,42.76 62.43,45.71 62.43,45.72 63.02,46.31 63.03,46.31 64.95,48.24 65.01,48.24 65.22,48.45 67.18,48.45 v1(67.89,47.74)
BUSY_P<8>: length 61.3
  TOP w0.2: v1(63.48,51.65) 63.93,51.2 63.97,51.2 64.41,51.65
  L4 w0.155: 7.77,46.04 8.09,46.36 8.09,46.38 8.33,46.62 8.33,46.63 8.35,46.65 8.35,46.7 8.4,46.75
  L4 w0.2: v1(63.48,51.65) 62.95,51.65 62.91,51.61 56.78,51.61 50.77,45.6 10,45.6 9.5,46.1 9.5,46.39 9.09,46.8 8.51,46.8 8.45,46.75 8.4,46.75 ; J1.32 7.77,45.42 7.77,46.04
BUSY_P<9>: length 63.8
  TOP w0.2: v1(66.7,54.19) 66.27,54.63 66.13,54.63 J2.G36
  L3 w0.2: v1(66.7,54.19) 65.84,55.05 63.24,55.05 53.78,45.59 9.31,45.59 J1.33
CLK_FROM_FPGA_N: length 63.7
  TOP w0.2: v1(62.29,20.5) 65.29,20.5 65.49,20.7 65.49,20.97 65.68,21.17
  L3 w0.154: 5.74,21.9 5.74,21.95 6.18,22.4 6.92,22.4 7.33,21.98 7.72,21.98 8.67,22.93 9.34,22.93
  L3 w0.2: 5.74,21.9 5.3,21.46 J1.36 ; v1(62.29,20.5) 60.91,20.5 60.47,20.06 59.6,20.06 57.04,22.63 10.97,22.63 10.69,22.68 10.52,22.93 9.34,22.93
CLK_FROM_FPGA_P: length 59.9
  TOP w0.2: 65.68,19.9 65.08,19.29 62.36,19.29 v1(62.29,19.36)
  L3 w0.2: J1.2 9.54,21.3 10.36,22.12 10.36,22.12 10.61,22.29 10.93,22.23 56.87,22.23 59.43,19.66 60.47,19.66 60.78,19.36 v1(62.29,19.36)
CLK_RSTB_N: length 60.6
  TOP w0.2: J2.H8 63.97,18.18 63.63,18.18 v1(63.18,18.63)
  BOTTOM w0.131: 8.45,21.28 8.45,21.1 8.13,20.78 8.13,20.7 7.93,20.5
  BOTTOM w0.2: v1(63.18,18.63) 63.02,18.63 62.85,18.47 62.85,18.45 62.65,18.25 47.79,18.25 45.66,20.39 9.8,20.39 9.6,20.59 9.6,20.83 9.13,21.3 8.47,21.3 8.45,21.28 ; 7.93,20.5 7.32,20.5 7.26,20.56 7.2,20.56 6.74,20.1 J1.35
CLK_RSTB_P: length 57.3
  TOP w0.2: v1(63.17,17.37) 63.63,16.91 63.97,16.91 J2.H7
  BOTTOM w0.2: J1.1 9.31,19.99 45.49,19.99 47.62,17.85 62.69,17.85 v1(63.17,17.37)
CLK_TO_FPGA_N: length 61.8
  TOP w0.2: J2.H5 64.27,14.67 64.23,14.67 63.98,14.43 54.26,14.43 48.39,20.3 9.74,20.3 9.13,19.7 8.47,19.7 7.57,20.59 7.36,20.59 6.94,21.01 6.94,21.2 J1.37
CLK_TO_FPGA_P: length 61.6
  TOP w0.2: J2.H4 65.02,14.15 65.02,15.06 64.66,15.42 64.17,15.42 63.81,15.06 63.81,14.95 63.7,14.83 54.43,14.83 48.55,20.7 9.86,20.7 9.66,20.9 9.66,21.23 J1.3
SCL_FROM_FPGA_N: length 68.7
  TOP w0.2: v1(68.59,31.34) 69.02,31.77 69.05,31.77 J2.D18
  L4 w0.155: 9.29,30.97 8.75,30.97 8.56,30.78 8.52,30.78 7.86,30.13 7.1,30.13 6.72,30.5
  L4 w0.2: v1(68.59,31.34) 69.01,30.91 69.01,30.52 69.21,30.32 69.21,29.81 68.86,29.46 68.5,29.46 68.49,29.45 62.75,29.45 60.69,31.52 9.84,31.52 9.29,30.97 ; J1.48 6.72,30.5
SCL_FROM_FPGA_P: length 64
  TOP w0.2: v1(68.61,30.07) 69.49,30.07 J2.D17
  L4 w0.155: 9.17,32.49 8.6,32.49 8.06,31.94 8.06,31.31
  L4 w0.2: 9.17,32.49 9.73,31.92 61.69,31.92 63.73,29.88 67.9,29.88 68.08,30.07 v1(68.61,30.07) ; J1.14 8.06,31.31
SDA_FROM_FPGA_N: length 82.1
  TOP w0.2: v1(55.42,21.11) 55.88,21.11 55.98,21.01 56.44,21.01 56.64,20.81 59.01,20.81 60.64,22.44 63.71,22.44 63.92,22.23 64.2,22.23 J2.H11
  L3 w0.15: J1.49 6.45,31.3 6.45,30.69 5.58,29.82
  L3 w0.2: 5.58,29.82 5.49,29.72 4.12,29.72 3.9,29.5 3.9,16.1 5.45,14.55 9.59,14.55 13.62,18.58 13.7,18.58 13.89,18.76 53.4,18.76 55.42,20.79 v1(55.42,21.11)
SDA_FROM_FPGA_P: length 85.9
  TOP w0.2: J2.H10 63.54,22.04 60.81,22.04 59.18,20.41 56.48,20.41 56.36,20.53 56.19,20.53 v1(56.19,20.41)
  L3 w0.15: 4.38,30.55 4.38,30.97 4.69,31.29 5.46,31.29 5.74,31.57 5.74,31.58 5.98,31.82 5.98,31.83 6.21,32.05 6.66,32.05
  L3 w0.2: v1(56.19,20.41) 55.6,20.41 53.56,18.36 14.05,18.36 13.87,18.18 arc(13.79,18.16) 13.72,18.12 9.75,14.15 5.28,14.15 3.5,15.93 3.5,29.67 4.38,30.55 ; 6.66,32.05 6.81,32.05 7.17,31.7 J1.15
SDA_TO_FPGA_N: length 61
  TOP w0.2: J2.H20 64.4,33.85 v1(63.41,33.85)
  L3 w0.131: 6.25,33.73 6,33.48 6,33.41 5.75,33.16 5.75,32.55
  L3 w0.155: 7.84,33.32 8.53,34.01 ; 6.91,33.58 7.17,33.32
  L3 w0.2: 7.17,33.32 7.84,33.32 ; 6.25,33.73 6.61,33.73 6.76,33.58 6.91,33.58 ; v1(63.41,33.85) 62.88,33.85 62.48,33.46 9.7,33.46 9.16,34.01 8.53,34.01 ; J1.50 5.75,32.55
SDA_TO_FPGA_P: length 57.2
  TOP w0.2: v1(63.4,32.6) 64.41,32.6 J2.H19
  L3 w0.2: J1.16 9.18,32.5 9.7,33.03 62.43,33.03 62.86,32.6 v1(63.4,32.6)
SYNC_FROM_FPGA_N: length 61.9
  TOP w0.14: 7.98,25.15 8.63,24.5
  TOP w0.2: J1.42 6.9,25.7 7.28,25.32 7.81,25.32 7.98,25.15 ; 65.68,24.98 65.38,25.29 65.29,25.29 65.28,25.3 65.11,25.3 64.76,25.65 64.17,25.65 64.07,25.75 63.67,25.75 63.57,25.65 63.07,25.65 62.84,25.88 61.82,25.88 60.77,24.82 9.45,24.82 9.13,24.5 8.63,24.5
SYNC_FROM_FPGA_P: length 62.4
  TOP w0.2: 65.68,23.71 66.3,24.32 66.3,25.21 65.93,25.58 65.68,25.58 65.61,25.65 65.44,25.65 65.08,26 65.08,26.17 65.02,26.24 65.02,26.49 64.66,26.85 64.17,26.85 64.06,26.74 63.68,26.74 63.57,26.86 63.07,26.86 62.48,26.28 61.74,26.28 arc(61.66,26.26) 61.6,26.22 60.66,25.28 arc(60.59,25.24) 60.52,25.22 10.07,25.22 9.2,26.1 J1.8
SYNC_SEL_N: length 63.2
  TOP w0.155: 9.6,29.77 9.13,29.3 8.62,29.3 7.93,28.62 7.83,28.62 7.71,28.5 7.46,28.5 7.05,28.91
  TOP w0.2: J2.H17 64.86,29.61 64.86,29.19 65.02,29.03 65.02,28.54 64.66,28.19 64.17,28.19 62.37,29.98 9.81,29.98 9.6,29.77 ; 7.05,28.91 6.03,28.91 6.03,28.9 J1.46
SYNC_SEL_P: length 58.7
  TOP w0.155: 8.07,29.72 8.07,30.35 8.63,30.91 9.02,30.91 9.58,30.36
  TOP w0.2: 9.58,30.36 62.84,30.36 J2.H16 ; J1.12 8.07,29.72
SYNC_TO_FPGA_N: length 68.5
  TOP w0.2: J2.D15 69.05,27.07 69.04,27.07 v1(68.6,27.52)
  BOTTOM w0.131: 8.56,27.61 8.09,27.14 8.09,27.1 7.89,26.9
  BOTTOM w0.2: 8.56,27.61 8.64,27.69 9.14,27.69 9.6,27.23 9.6,27.09 9.9,26.79 59.35,26.79 61.22,28.66 63.58,28.66 63.79,28.45 64.89,27.34 64.89,26.08 65.67,25.31 66.95,25.31 67.99,26.35 67.99,26.49 68.06,26.56 68.06,26.59 68.22,26.75 68.22,27.14 v1(68.6,27.52) ; 7.89,26.9 7.32,26.9 7.31,26.91 6.86,26.91 J1.43
SYNC_TO_FPGA_P: length 64.8
  TOP w0.2: v1(68.6,26.24) 69.04,25.8 69.05,25.8 J2.D14
  BOTTOM w0.2: J1.9 9.31,26.39 59.52,26.39 61.39,28.26 63.41,28.26 64.49,27.18 64.49,26 arc(64.51,25.92) 64.55,25.86 65.44,24.96 arc(65.51,24.92) 65.59,24.91 67.03,24.91 arc(67.11,24.92) 67.17,24.96 68.33,26.12 68.42,26.2 68.39,26.21 68.44,26.22 68.46,26.24 v1(68.6,26.24)
TRIG_FROM_FPGA_N: length 64.9
  TOP w0.2: v1(68.6,23.72) 69.05,23.26 69.05,23.26 J2.D12
  BOTTOM w0.131: 7.94,23.8 8.63,24.49
  BOTTOM w0.155: 7.94,23.8 7.92,23.8 7.85,23.72 6.87,23.72
  BOTTOM w0.2: J1.39 6.87,23.72 ; 8.63,24.49 60.11,24.49 61.52,23.07 61.64,22.96 63.07,22.96 63.75,23.64 64.04,23.76 67.93,23.76 67.97,23.72 v1(68.6,23.72)
TRIG_FROM_FPGA_P: length 62.8
  TOP w0.2: v1(68.61,22.43) 69.05,21.99 69.05,21.99 J2.D11
  BOTTOM w0.2: v1(68.61,22.43) 68,23.04 68,23.13 67.81,23.32 arc(67.76,23.35) 67.71,23.36 64.12,23.36 63.98,23.3 63.24,22.56 61.48,22.56 61.24,22.79 60,24.03 arc(59.94,24.07) 59.86,24.09 8.8,24.09 J1.5
TRIG_SEL_N: length 62.7
  TOP w0.2: v1(66.64,28.8) 66.19,28.34 66.13,28.34 65.68,28.79
  L3 w0.155: 8.8,29.2 8.51,29.2 8.33,29.03 8.33,29.02 8.09,28.78 8.09,28.75 8,28.65
  L3 w0.2: J1.45 6.84,28.49 7.83,28.49 8,28.65 ; v1(66.64,28.8) 66.16,28.31 65.35,28.31 arc(65.21,28.37) 65.15,28.51 65.15,28.68 64.63,29.2 9.1,29.2 9.09,29.2 8.8,29.2
TRIG_SEL_P: length 60
  TOP w0.2: v1(66.64,27.52) 66.2,27.96 66.13,27.96 65.68,27.52
  L3 w0.2: J1.11 8.8,28.68 8.92,28.8 64.46,28.8 64.75,28.51 arc(64.92,28.09) 65.35,27.91 66.25,27.91 v1(66.64,27.52)
TRIG_TO_FPGA_N: length 73.2
  TOP w0.2: v1(71.74,22.45) 71.31,22.89 71.21,22.89 70.77,22.44
  L4 w0.131: 8.54,24.5 8.32,24.28 8.32,24.22 8,23.9 8,23.72
  L4 w0.2: v1(71.74,22.45) 72.16,22.04 72.16,21.57 72.35,21.37 72.35,20.87 72,20.52 71.5,20.52 71.45,20.57 71.44,20.57 70.64,21.36 68.07,21.36 67.35,22.08 67.35,22.98 66.36,23.97 62.91,23.97 62.55,24.33 9.3,24.33 9.13,24.5 8.54,24.5 ; J1.40 6.92,24.1 7.32,23.7 7.98,23.7 8,23.72
TRIG_TO_FPGA_P: length 69.1
  TOP w0.2: v1(71.75,21.12) 71.27,21.61 71.21,21.61 70.77,21.17
  L4 w0.131: 7.86,25.25 8.13,25.53 8.13,25.58 8.4,25.85 8.4,25.91
  L4 w0.2: 7.86,25.25 7.86,24.71 J1.6 ; v1(71.75,21.12) 71.37,21.5 71.36,21.5 71.1,21.76 68.23,21.76 67.75,22.25 67.75,23.14 66.52,24.37 63.07,24.37 62.72,24.73 10.44,24.73 10.2,24.97 10.2,25.07 9.19,26.08 8.57,26.08 8.4,25.91

## Copper pours and planes (outline as drawn; the poured copper is in the pictures)
GND_SIGNAL on L2: 0.3,63.9 0.3,3.6 27.4,3.6 27.4,0.4 76.1,0.4 76.1,68.3 22.7,68.3 22.7,66.2 22.6,66.1 11.8,66.1 11.8,63.9 ; 13 cut-outs
GND_SIGNAL on L5: 27.4,0.4 27.4,3.6 0.3,3.6 0.3,63.9 11.8,63.9 11.8,66.1 22.6,66.1 22.7,66.2 22.7,68.3 48.8,68.3 48.8,65 49.1,65 49.1,64.7 58.1,64.7 58.1,65 58.21,65 58.21,68.3 76.1,68.3 76.1,0.4 ; 12 cut-outs

Small or netless copper shapes (teardrops, artwork), in the pictures only: 49 on TOP

## Text on the board
BOTTOM: 6
Ref Des/Silkscreen Bottom: pc054a_fmc | Bristol HEP | Feb 2017
User.Comments: 2 | Alter padstacks - FMC,VHDCI | 12/6/14 | D.Cussans | Feb 17 | Interface SoLiD clock board | pc054a_fmc
TOP: 1
Ref Des/Assembly Top: Assembly | Top
Ref Des/Silkscreen Top: SoLiD Clock Fanout | pc054a_fmc
L2: 2
L3: 3
L4: 4
L5: 5
User.6: FIGURE | SIZE | 0.3302 | 0.65 | 1.2 | 2.6924 | 1.3 | 1.75 | DRILL CHART: TOP to BOTTOM | ALL UNITS ARE IN MILLIMETERS | PLATED | NON-PLATED | QTY | 93 | 68 | 2 | 4
